# Altium PCB DSM_VB2032-241203_Pcb.PcbDoc
Units mm, origin at the board's own origin, x right, y up, seen from the top; angles counter-clockwise.
Board outline 18 x 18 mm, 4 copper layers (Top Layer, innerLayer 1, innerLayer 2, Bottom Layer), stack 0.603 mm thick; 58 components, 30 nets, 219 pads, 46 vias.
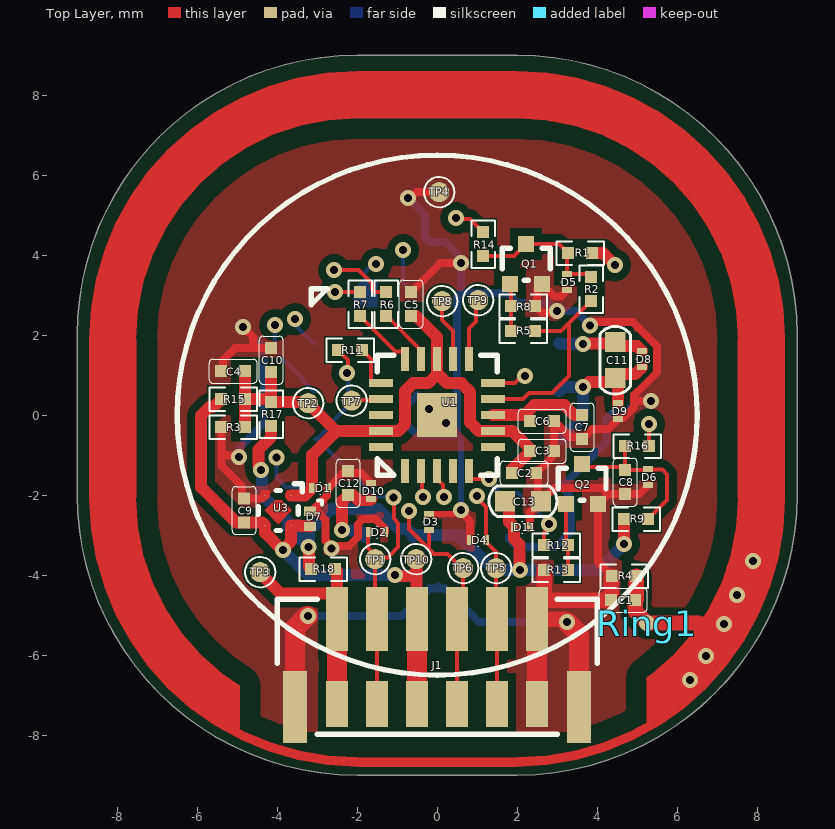
[diagram p0: Top Layer view]
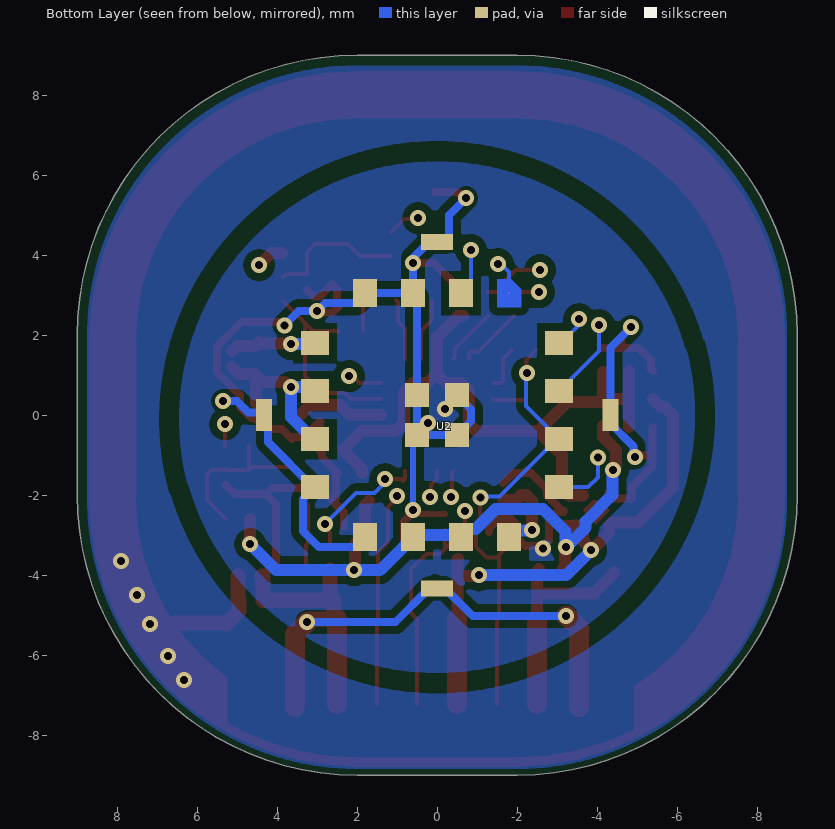
[diagram p1: Bottom Layer view, seen from below]
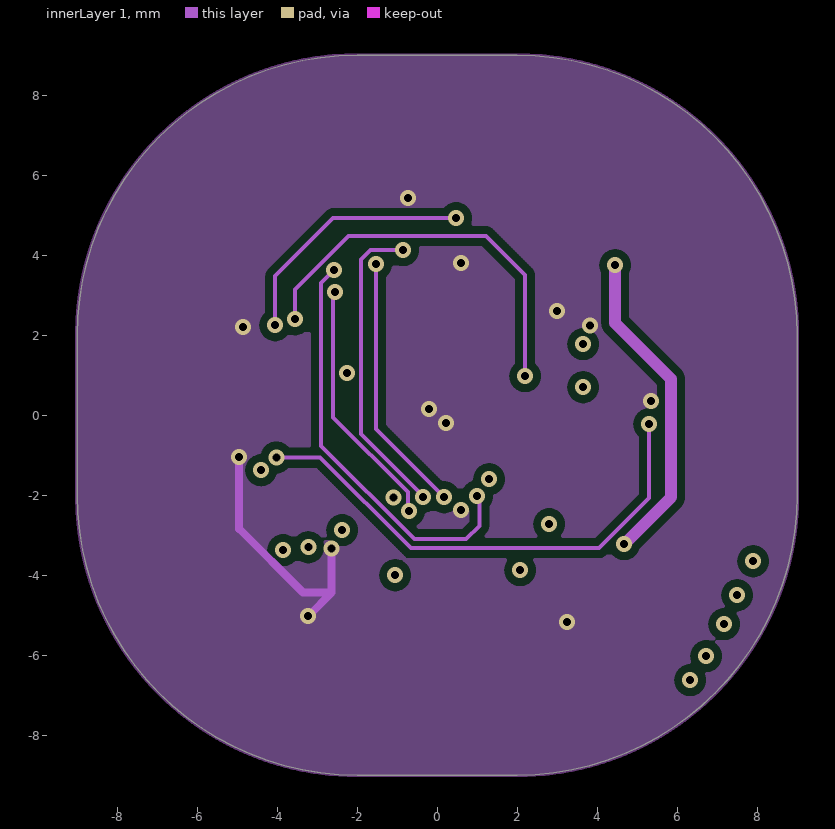
[diagram p2: innerLayer 1]
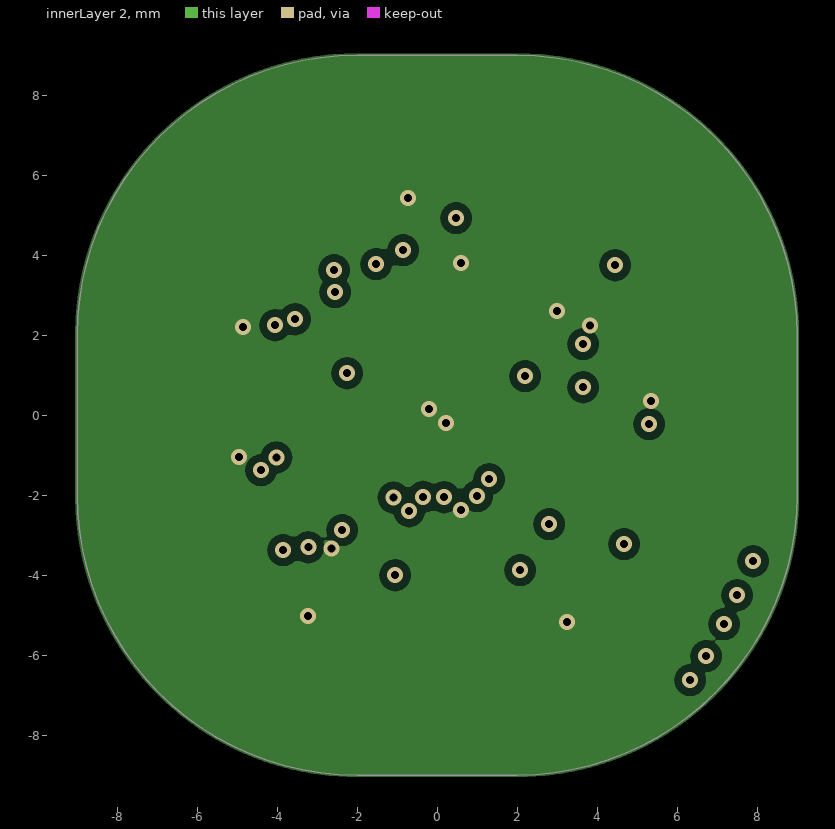
[diagram p3: innerLayer 2]
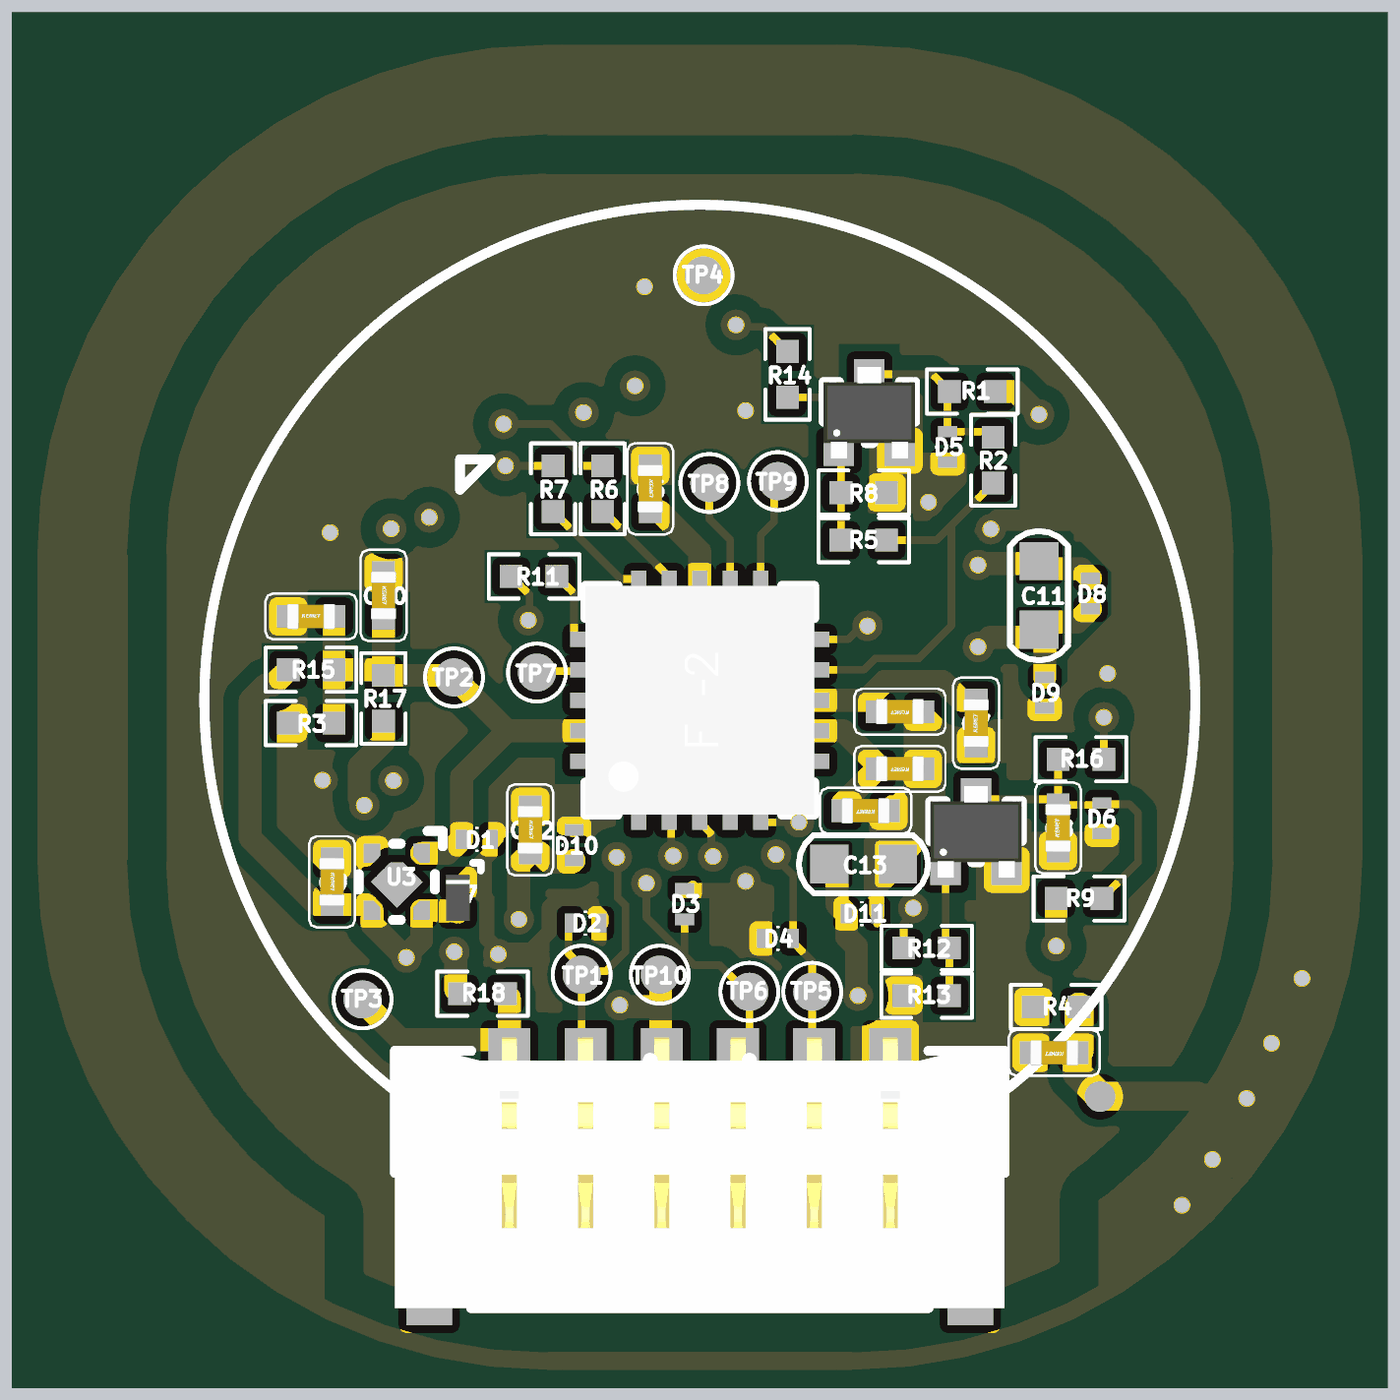
[diagram p4: 3D render of the assembled board from above, using the file's embedded part models]

## Layer stack, top to bottom
Top Solder: solder mask 0.0102, Solder Resist, Dk 3.5
Top Layer: signal copper 0.0356
Dielectric 2: prepreg 0.0711, PP-006, Dk 4.1
innerLayer 1: signal copper 0.035
Dielectric 1: dielectric 0.32, FR-4, Dk 4.8
innerLayer 2: signal copper 0.035
Dielectric 3: prepreg 0.0711, PP-006, Dk 4.1
Bottom Layer: signal copper 0.0356
Bottom Solder: solder mask 0.0102, Solder Resist, Dk 3.5

## Board outline
-2.001,-8.999 cw(c-2.001,-1.999) -9.001,-1.999 -9.001,2.001 cw(c-2.001,2.001) -2.001,9.001 1.999,9.001 cw(c1.999,2.001) 8.999,2.001 8.999,-1.999 cw(c1.999,-1.999) 1.999,-8.999

## Design rules (kind name [scope] priority, off if disabled: settings)
BoardOutlineClearance [All] p1: gap=0 ignorepadtopadclearanceinfootprint=FALSE
Clearance [All] p1: gap=0.1 ignorepadtopadclearanceinfootprint=FALSE except(0.2: Arc-Fill Arc-Poly Arc-Region Track-Fill Track-Poly Track-Region SMDPad-Fill SMDPad-Poly SMDPad-Region THPad-Fill THPad-Poly THPad-Region Via-Fill Via-Poly Via-Region; 0.5: Fill-Fill Fill-Poly Fill-Region Poly-Poly Poly-Region Region-Region)
HoleToHoleClearance [All] p1: gap=0 allowstackedmicrovias=TRUE
MinimumSolderMaskSliver [All] p1: minsoldermaskwidth=0
PolygonConnect [All] p1: connectstyle=Direct reliefconductorwidth=0.254 reliefentries=4 polygonreliefangle="90 Angle" airgapwidth=0
RoutingVias [All] p1: holewidth=0.711 width=1.27 viastyle="Through Hole" minholewidth=0.711 minwidth=1.27 maxholewidth=0.711 maxwidth=1.27
SilkToSilkClearance [All] p1: silktosilkclearance=0
SilkToSolderMaskClearance [IsPad] p1: minsilkscreentomaskgap=0 clearancetoexposedcopper=TRUE
SolderMaskExpansion [All] p1: expansion=0.102 istentingtop=FALSE
Width [All] p1: maxlimit=1 minlimit=0.1 preferedwidth=0.1
26 further rules are at their usual default settings.

## Components (designator, comment, footprint, x,y, rotation, side; value= is the part's Value field where it differs from the comment)
C1 "2.2nF,25V,10%,村田" C0201 4.65,-4.625 r180 top
C2 "2.2uF,10V,20%,太诱" C0201 2.175,-1.45 r180 top
C3 "0.1uF,16V,10%,村田" C0201 2.625,-0.9 r180 top
C4 "0.1uF,16V,10%,村田" C0201 -5.1,1.1 r0 top
C5 "0.1uF,16V,10%,村田" C0201 -0.65,2.775 r270 top
C6 "2.2uF,10V,20%,太诱" C0201 2.625,-0.15 r180 top
C7 "0.1uF,16V,10%,村田" C0201 3.625,-0.3 r90 top
C8 "47nF,16V,10%,村田" C0201 4.7,-1.675 r90 top
C9 "2.2uF,10V,20%,太诱" C0201 -4.825,-2.383 r270 top
C10 "0.1uF,16V,10%,村田" C0201 -4.15,1.375 r270 top
C11 "2.2uF,10V,20%,太诱" CC0402-M 4.45,1.375 r270 top
C12 "2.2nF,25V,10%,村田" C0201 -2.225,-1.7 r270 top
C13 "2.2uF,10V,20%,太诱" CC0402-M 2.15,-2.15 r180 top
D1 "PT4CR3V3NE" SOD-962 -2.925,-1.825 r180 top
D2 "PT4CR3V3NE" SOD-962 -1.5,-2.925 r180 top
D3 "PT4CR3V3NE" SOD-962 -0.2,-2.675 r270 top
D4 "PT4CR3V3NE" SOD-962 1.025,-3.125 r0 top
D5 "PT4CR3V3NE" SOD-962 3.25,3.325 r90 top
D6 "PT4CR3V3NE" SOD-962 5.275,-1.55 r90 top
D7 "PT4C051V" "DFN0603-2L 0.3*0.23 Pitch 0.38" -3.175,-2.59 r270 top
D8 "PT4CR3V3NE" SOD-962 5.125,1.4 r270 top
D9 "PT4C121V" SOD-962 4.525,0.1 r270 top
D10 "PT4C121V" SOD-962 -1.65,-1.9 r90 top
D11 "PT4CR3V3NE" SOD-962 2.125,-2.8 r180 top
J1 "Connector 6 Pins" A1004LF-06A 0,-6.2 r180 top
Q1 "SXSC568R//NC" SOT-723 2.225,3.775 r0 top
Q2 "SXSC568R" SOT-723 3.625,-1.725 r0 top
R1 "10KΩ,5%" R0201 3.575,4.05 r0 top
R2 "100Ω,5%" R0201 3.85,3.15 r90 top
R3 "10KΩ,5%" R0201 -5.1,-0.3 r0 top
R4 "0Ω,5%" R0201 4.675,-4.025 r0 top
R5 "2.2KΩ,5%//NC" R0201 2.15,2.1 r180 top
R6 "100Ω,5%" R0201 -1.275,2.775 r270 top
R7 "100Ω,5%" R0201 -1.925,2.775 r270 top
R8 "10KΩ,5%//NC" R0201 2.15,2.725 r0 top
R9 "10KΩ,5%" R0201 4.975,-2.6 r180 top
R11 "330Ω,5%" R0201 -2.175,1.625 r0 top
R12 "2.2KΩ,5%" R0201 2.975,-3.25 r0 top
R13 "10KΩ,5%" R0201 2.975,-3.875 r180 top
R14 "1KΩ,5%" R0201 1.15,4.275 r270 top
R15 "0Ω,5%//NC" R0201 -5.1,0.4 r0 top
R16 "1KΩ,5%" R0201 5,-0.775 r180 top
R17 "0Ω,5%//NC" R0201 -4.15,0.025 r270 top
R18 "0Ω,5%" R0201 -2.85,-3.85 r180 top
Ring1 "Ring" Ring 5.25,-5.2 r90 bottom
TP1 "TP" TP（Φ0.5） -1.55,-3.6 r90 top
TP2 "TP" TP（Φ0.5） -3.225,0.3 r90 top
TP3 "TP" TP（Φ0.5） -4.425,-3.925 r90 top
TP4 "TP" TP（Φ0.5） 0.05,5.575 r90 top
TP5 "TP" TP（Φ0.5） 1.475,-3.825 r90 top
TP6 "TP" TP（Φ0.5） 0.65,-3.825 r90 top
TP7 "TP" TP（Φ0.5） -2.137,0.363 r90 top
TP8 "TP" TP（Φ0.5） 0.125,2.85 r90 top
TP9 "TP" TP（Φ0.5） 1.025,2.875 r90 top
TP10 "TP" TP（Φ0.5） -0.525,-3.6 r90 top
U1 "ACM32FP421FIU6" "QFN 20 3*3 Pitch 0.4" 0,0 r90 top locked
U2 "BF83112DW7&D_7&F_4" BF83112DW7&D_7&F_4 0,0 r90 bottom locked
U3 "LP3997-33QVF" "DFN 1*1-4L" -3.975,-2.383 r180 top

## Footprints (in the part's own frame and the unit in brackets; to place one, negate y for a bottom-side part, rotate by r counter-clockwise, add the part's x,y. Pads: shape width x height; smd on the part's side, far side on the other; paste and mask are expansions set on the pad)
A1004LF-06A [mm] "立贴 带卡扣 不带耳朵 6 Pins 间距 1.0"
  rect 0.55x1.15 smd: 1(-2.5,1.025) 2(-1.5,1.025) 3(-0.5,1.025) 4(0.5,1.025) 5(1.5,1.025) 6(2.5,1.025)
  rect 0.55x1.6 smd: 1(-2.5,-1.1) 2(-1.5,-1.1) 3(-0.5,-1.1) 4(0.5,-1.1) 5(1.5,-1.1) 6(2.5,-1.1)
  rect 0.6x1.8 smd: A(-3.55,1.1) B(3.55,1.1)
  round 0.15 on Mech15: ""(0,0)
  silkscreen extent -4,-1.6 4,1.77, body extent -4,-1.78 4,1.77, height 4.3
BF83112DW7&D_7&F_4 [mm]
  round 0.025 smd: 1(3.05,-1.8)
  rect 0.7x0.6 smd: 2(3.05,-0.6) 3(3.05,0.6) 4(3.05,1.8) 9(-3.05,1.8) 10(-3.05,0.6) 11(-3.05,-0.6) 12(-3.05,-1.8)
  rect 0.6x0.7 smd: 5(1.8,3.05) 6(0.6,3.05) 7(-0.6,3.05) 8(-1.8,3.05) 13(-1.8,-3.05) 14(-0.6,-3.05) 15(0.6,-3.05) 16(1.8,-3.05)
  rect 0.6x0.6 smd: 17(0.5,-0.5) 18(0.5,0.5) 19(-0.5,-0.5) 20(-0.5,0.5)
  rect 0.4x0.8 smd: 21(4.33,0) 23(-4.33,0)
  rect 0.8x0.4 smd: 22(0,4.33) 24(0,-4.33)
  round 0.1 on Mech15: ""(0,0)
  round 0.1 on Mech13: ""(0.15,-0.15)
  Top Layer region: 2.7,-1.5 2.7,-2.1 3.15,-2.1 3.4,-1.85 3.4,-1.5
C0201 [mm]
  rect 0.3x0.3 smd: 1(-0.3,0) 2(0.3,0)
  round 0.05 on Mech15: ""(0,0)
  silkscreen extent -0.6,-0.3 0.6,0.3, body extent -0.31,-0.17 0.32,0.16, height 0.37
CC0402-M [mm]
  rect 0.5x0.51 smd mask+0.051: 1(-0.45,0) 2(0.45,0)
  silkscreen extent -0.85,-0.38 0.85,0.38
"DFN0603-2L 0.3*0.23 Pitch 0.38" [mm]
  rect 0.23x0.3 smd: 1(-0.19,0) 2(0.19,0)
  round 0.03 on Mech15: ""(0,0)
  silkscreen extent -0.46,0.2 -0.36,0.3, body extent -0.31,-0.16 0.31,0.15, height 0.36
"DFN 1*1-4L" [mm]
  round 0.025 smd: 1(-0.325,-0.375) 2(0.325,-0.375) 3(0.325,0.375) 4(-0.325,0.375) A(0,0.042)
  round 0.05 on Mech15: ""(0,0)
  Top Layer region: -0.085,-0.255 -0.339,0 0,0.339 0.339,0 0.085,-0.255
  Top Layer region: 0.215,-0.5 0.215,-0.337 0.302,-0.25 0.435,-0.25 0.435,-0.5
  Top Layer region: -0.435,0.25 -0.302,0.25 -0.215,0.337 -0.215,0.5 -0.435,0.5
  Top Layer region: -0.435,-0.5 -0.215,-0.5 -0.215,-0.337 -0.302,-0.25 -0.435,-0.25
  Top Layer region: 0.302,0.25 0.215,0.337 0.215,0.5 0.435,0.5 0.435,0.25
  silkscreen extent -0.6,-0.67 0.5,0.5, body extent -0.5,-0.5 0.5,0.5, height 0.59
"QFN 20 3*3 Pitch 0.4" [mm]
  rect 0.6x0.2 smd: 1(-1.4,0.8) 2(-1.4,0.4) 3(-1.4,0) 4(-1.4,-0.4) 5(-1.4,-0.8) 11(1.4,-0.8) 12(1.4,-0.4) 13(1.4,0) 14(1.4,0.4) 15(1.4,0.8)
  rect 0.2x0.6 smd: 6(-0.8,-1.4) 7(-0.4,-1.4) 8(0,-1.4) 9(0.4,-1.4) 10(0.8,-1.4) 16(0.8,1.4) 17(0.4,1.4) 18(0,1.4) 19(-0.4,1.4) 20(-0.8,1.4)
  rect 1.1x1 smd: A(0,0)
  round 0.1 on Mech15: ""(0,0)
  silkscreen extent -1.5,-1.5 1.5,1.5, body extent -1.5,-1.5 1.5,1.5, height 0.65
R0201 [mm]
  rect 0.3x0.3 smd: 1(-0.3,0) 2(0.3,0)
  round 0.05 on Mech15: ""(0,0)
  silkscreen extent -0.6,-0.29 0.6,0.29, body extent -0.3,-0.15 0.3,0.15, height 0.27
Ring [mm] "直径0.4mm"
  round 0.4 smd far side mask+0.102: 1(0,0)
SOD-962 [mm] "类似0201"
  rect 0.15x0.25 smd: 1(-0.2,0) 2(0.2,0)
  round 0.05 on Mech15: ""(0,0)
  silkscreen extent -0.01,-0.15 0.01,0.15, body extent -0.3,-0.15 0.3,0.15, height 0.37
SOT-723 [mm]
  rect 0.4x0.4 smd: 1(-0.4,-0.5) 2(0.4,-0.5) 3(0,0.5)
  round 0.1 on Mech15: ""(0,0)
  silkscreen extent -0.6,-0.4 0.6,0.4, body extent -0.6,-0.6 0.6,0.6, height 0.59
TP（Φ0.5） [mm]
  round 0.5 smd: 1(0,0)
  round 0.1 on Mech15: ""(0,0)
  silkscreen extent -0.38,-0.38 0.38,0.38

## Part data
C1 C2 C3 C4 C5 C6 C7 C8 C9 C10 C11 C12 C13: library part Cap, "贴片电容", supplier=深圳市扬盛达科技有限公司
  C1 C12: Material code=3040100000019
  C2 C6 C9 C11 C13: Material code=3040000000063
  C3 C4 C5 C7 C10: Material code=3040100000012
  C8: Material code=3040100000024
D1 D2 D3 D4 D5 D6 D7 D8 D11: library part ESD, "双向静电二极管", supplier=深圳市玛珂斯科技有限公司
  D1 D2 D3 D4 D5 D6 D8 D11: Material code=3160100000178
  D7: Material code=3160100000174
D9 D10: library part TVS, "双向瞬态抑制二极管", Material code=3160100000173, supplier=深圳市玛珂斯科技有限公司
J1: "连接器", supplier=深圳市富美康电子有限公司
Q1 Q2: library part "NPN BCE", "NPN型三极管", Material code=3160100000013, supplier=深圳市扬盛达科技有限公司
R1 R2 R3 R4 R5 R6 R7 R8 R9 R11 R12 R13 R14 R15 R16 R17 R18: library part RES, "贴片电阻", supplier=深圳市扬盛达科技有限公司
  R1 R3 R8 R9 R13: Material code=3050000000004
  R2 R6 R7: Material code=3050000000018
  R4 R15 R17 R18: Material code=3050000000061
  R5 R12: Material code=3050000000006
  R11: Material code=3050000000007
  R14 R16: Material code=3050000000003
Ring1: "金属环", supplier=深圳市添营精密科技有限公司&东莞市飞佳五金有限公司&东莞市盟展五金科技有限公司
TP1 TP2 TP3 TP4 TP5 TP6 TP7 TP8 TP9 TP10: "非正常物料无需采购", Material code=无, supplier=非正常物料线路板厂会做好的
U1: library part ACM32FP421, "微控制单元", Material code=3350000000037, supplier=上海航芯电子科技股份有限公司
U2: "电容按压式指纹识别芯片", supplier=深圳贝特莱电子科技股份有限公司
U3: library part "LDO 4 Pins", "线性稳压器", supplier=深圳市思派德科技有限公司

## Via types
v1: diameter 0.4, hole 0.2, Top Layer to Bottom Layer, tented both sides, 46 vias

## Nets (pads, with @x,y where several pads share a name; then routed paths per layer and width w, separated by ;. In a path a pad name is that pad's centre, name@x,y a point inside that pad or via, vN(x,y) a via of type N, cw(c..) or ccw(c..) an arc to the next point about the centre after c; other vN are vias at no path point)
5V: C9.2 D7.2 J1.4 R15.1 TP10.1 U3.3 U3.4 | length 13.7
  Top Layer w0.3: R15.1 -5.6,0.2 -5.695,0.2 -5.9,-0.005 -5.9,-1.803 -5.02,-2.683 -4.375,-2.683 U3.3 -4.3,-2.833 -4.3,-2.943 v1@-3.868,-3.375 ; v1(-3.85,-3.375) -3.85,-3.349 -3.65,-3.149 U3.4 -3.436,-2.758 -3.429,-2.765 -3.19,-2.765 D7.2 ; v1(-1.05,-4) -1.031,-4.019 -0.518,-4.019 -0.513,-4.025 ; TP10.1 -0.513,-3.612 -0.513,-4.025 ; J1.4@-0.5,-5.1 -0.513,-5.088 -0.513,-4.025
  Top Layer w0.5: J1.4@-0.5,-7.225 J1.4@-0.5,-5.1
  Bottom Layer w0.3: v1(-3.85,-3.375) -3.225,-4 v1(-1.05,-4)
BOOT: TP7.1 U1.17 | length 0.8
  Top Layer w0.1: TP7.1 -2.118,0.382 -1.418,0.382 U1.17
ESD-GND: C1.1 R4.2 Ring1.1 | length 5.5
  Top Layer w0.381: R4.2 4.975,-4.6 C1.1 4.95,-4.895 5.25,-5.195 Ring1.1 5.254,-5.196 6.533,-5.196 6.558,-5.221 7.171,-5.221 v1(7.175,-5.225) 7.175,-5.23 6.81,-5.595 6.81,-5.628 6.54,-5.897 6.487,-5.897 6,-6.384 6,-6.95
  other v1: 6.325,-6.625 6.725,-6.025 7.5,-4.5 7.9,-3.65
FP_INT: D2.2 J1.5 R11.1 TP1.1 U2.14 | length 11.6
  Top Layer w0.1: R11.1 -2.234,1.384 -2.234,1.066 v1(-2.25,1.05) ; D2.2 -1.725,-2.95 -1.725,-3.317 -1.55,-3.492 TP1.1 ; J1.5@-1.5,-7.225 -1.5,-5.1 -1.55,-5.05 TP1.1 ; v1(-1.09,-2.059) -1.078,-2.071 -1.078,-2.587 -0.975,-2.691 -0.975,-3.3 -1.23,-3.555 -1.505,-3.555 TP1.1
  Bottom Layer w0.1: U2.14 U2.14@-3,-0.6 ; v1(-2.25,1.05) -2.225,1.025 -2.225,0.225 -2.75,-0.3 -2.75,-0.35 U2.14@-3,-0.6 ; v1(-1.09,-2.059) -1.114,-2.035 -1.565,-2.035 U2.14@-3,-0.6
FVDD: C11.1 D8.1 U2.5 | length 2.2
  Top Layer w0.3: v1(3.65,1.775) 3.669,1.794 4.419,1.794 C11.1 4.55,1.725 5,1.725 D8.1
  Bottom Layer w0.3: U2.5 3.075,1.775 v1(3.65,1.775)
FVSS: C11.2 D8.2 D9.1 U2.6 U2.7 | length 4.6
  Top Layer w0.3: v1(3.65,0.7) 3.677,0.7 3.802,0.825 4.35,0.825 C11.2 ; D9.1 4.525,0.85 C11.2 ; D8.2 4.95,1.025 4.55,1.025 C11.2
  Bottom Layer w0.3: U2.7 3.1,-0.6 3.65,-0.05 v1(3.65,0.7) 3.15,0.7 U2.6
GND: C1.2 C2.1 C3.1 C4.1 C5.1 C6.1 C7.1 C8.1 C9.1 C10.1 C12.1 C13.1 D1.1 D2.1 D3.1 D4.1 D5.1 D6.1 D7.1 D9.2 D10.2 D11.1 J1.1 J1.A J1.B Q1.2 Q2.2 R3.1 R4.1 R8.2 R13.2 TP4.1 U1.A U2.3 U2.4 U2.8 U2.9 U2.17 U2.18 U2.19 U2.20 U2.21 U2.22 U2.23 U2.24 U3.2 | length 81.7
  Top Layer w0.15: D3.1 0.432,-2.475 0.532,-2.375 v1(0.6,-2.375)
  Top Layer w0.2: R3.1 -5.388,-0.313 -5.388,-0.904 ; C4.1 -5.35,1.15 -5.35,1.383 -5.233,1.5 -5.225,1.5 -5.05,1.675 -4.6,1.675 ; v1(-4.95,-1.05) -4.988,-1.012 -5.28,-1.012 -5.388,-0.904 ; C9.1@-4.875,-2.083 -4.875,-1.785 -5.388,-1.272 -5.388,-0.904 ; v1(-4.85,2.2) -4.6,1.95 -4.6,1.675 ; C9.1 -4.375,-2.083 U3.2 ; C10.1 -4.6,1.675 ; v1(-2.645,-3.332) -2.645,-3.278 -2.793,-3.13 -2.793,-2.614 -2.992,-2.415 -3.16,-2.415 D7.1 -3.14,-2.4 -2.75,-2.01 -2.75,-1.85 D1.1 -2.35,-1.45 -2.275,-1.45 C12.1 -2.175,-1.45 -1.9,-1.45 D10.2 ; v1@-2.595,-3.275 -2.209,-3.275 -1.975,-3.041 -1.975,-2.717 -1.858,-2.6 -1.542,-2.6 -1.3,-2.842 D2.1 ; v1(-0.725,5.425) -0.671,5.425 -0.521,5.575 TP4.1 ; C5.1 0.075,3.8 v1(0.6,3.8) ; v1(0.6,-2.375) 0.6,-2.429 0.825,-2.654 D4.1 ; D11.1 2.325,-2.425 2.445,-2.305 2.45,-2.305 2.6,-2.155 C13.1 ; C6.1@2.925,-0.175 C3.1 2.875,-0.95 2.875,-1.05 C2.1 2.525,-1.5 2.525,-2.075 C13.1 ; C6.1 2.912,-0.162 2.937,-0.162 3.325,-0.55 3.575,-0.55 C7.1 3.875,-0.35 4.275,-0.35 D9.2 4.55,-0.075 4.645,-0.075 4.925,0.205 4.925,0.353 ; v1(3,2.6) 2.962,2.562 2.637,2.562 2.625,2.55 R8.2 2.5,2.775 2.5,3.15 Q1.2 2.904,2.996 2.93,2.97 3.095,2.97 3.225,3.1 D5.1 ; v1(3.818,2.246) 3.856,2.284 3.934,2.284 3.975,2.325 4.895,2.325 5.5,1.72 5.5,1.075 4.925,0.5 4.925,0.353 ; R4.1 4.025,-3.675 Q2.2 4.275,-1.975 ; D6.1@5.25,-1.775 5.05,-1.975 C8.1 4.275,-1.975 ; v1(5.35,0.35) 5.347,0.353 4.925,0.353 ; C13.1 2.6,-2.145 2.92,-1.825 4.125,-1.825 4.275,-1.975
  Top Layer w0.381: R13.2 2.675,-4.534 J1.1@2.584,-4.625 ; v1(3.25,-5.175) 3.245,-5.175 3.17,-5.1 2.5,-5.1 2.584,-5.015 J1.1@2.584,-4.625 ; R4.1 4.35,-4.05 C1.2 J1.1@2.584,-4.625
  Top Layer w0.5: J1.B -3.55,-5.318 -3.257,-5.025 v1(-3.225,-5.025) ; J1.1@2.5,-7.225 J1.1@2.5,-5.1 ; v1(3.25,-5.175) 3.55,-5.475 J1.A
  innerLayer 1 w0.2: v1(-4.95,-1.05) -4.95,-2.841 -3.354,-4.436 -2.636,-4.436 ; v1(-3.225,-5.025) -2.636,-4.436 ; v1(-2.645,-3.332) -2.645,-4.428 -2.636,-4.436
  Bottom Layer w0.15: U2.20 0.6,-0.6 v1(0.6,-2.375)
  Bottom Layer w0.2: v1(-4.95,-1.05) -4.912,-1.012 -4.912,-0.782 -4.33,-0.2 U2.24 -4.33,1.68 v1(-4.85,2.2) ; v1(-3.225,-5.025) -0.895,-5.025 -0.2,-4.33 U2.23 ; v1(-0.725,5.425) -0.3,5 -0.3,4.43 -0.2,4.33 U2.21 0.2,4.33 0.6,3.93 U2.3 ; U2.17 -0.85,0.15 -0.85,-0.15 U2.19 U2.20 U2.18 0.5,2.95 U2.3 ; U2.23@0.05,-4.28 U2.23 ; U2.9 1.8,-3.1 2,-3.3 2.95,-3.3 3.35,-2.9 3.35,-2.1 3.3,-2.05 3.3,-2 U2.8@3.1,-1.8 ; U2.8 U2.8@3.1,-1.8 ; v1(3.25,-5.175) 1.045,-5.175 0.2,-4.33 U2.23 ; v1(3.818,2.246) 3.464,2.6 v1(3,2.6) 2.8,2.8 2,2.8 1.8,3 U2.4 U2.3 ; v1(5.35,0.35) 5,0.35 4.713,0.063 4.393,0.063 U2.22 4.23,-0.1 4.23,-0.67 U2.8@3.1,-1.8
  other v1: 0.225,-0.2 -0.2,0.15
HVDD: C12.2 D10.1 U2.12 | length 2.2
  Top Layer w0.3: v1@-2.375,-2.848 -2.375,-2.15 C12.2 -2.1,-2 -1.975,-2.125 -1.675,-2.125 D10.1
  Bottom Layer w0.3: v1(-2.375,-2.875) -2.367,-2.875 -2.353,-2.889 -1.95,-2.889 -1.95,-2.9 U2.12
INT: R11.2 U1.16 | length 1.1
  Top Layer w0.1: R11.2 -1.65,1.4 -1.65,0.85 -1.6,0.8 U1.16
MCU3_3V: C2.2 C3.2 C4.2 C5.2 C10.2 D1.2 R3.2 R15.2 R17.1 TP2.1 U1.7 U1.13 U1.19 U3.1 | length 16.8
  Top Layer w0.3: R3.2 R15.2 ; C4.2 R15.2 ; C10.2 R17.1 ; U3.1 -3.308,-2.008 D1.2 -3.125,-1 -2.525,-0.4 ; C5.2 -0.525,2.475 0,1.95 U1.13 0,1.026 ; C2.2 1.875,-1.35 C3.2 2.325,-0.841 1.884,-0.4 U1.7 1.046,-0.4 0.825,-0.179 0.825,0.579 0.604,0.8 0.246,0.8 0.021,1.026 0,1.026 ; R15.2 -4.225,0.4 R17.1 ; R17.1 -3.25,0.325 TP2.1 -2.525,-0.4 ; -2.525,-0.4 U1.19 -0.976,-0.4 -0.8,-0.224 -0.8,0.604 -0.604,0.8 -0.226,0.8 0,1.026
NetQ1_1: Q1.1 R5.2 R8.1 | length 1.2
  Top Layer w0.1: Q1.1 1.85,3.25 R8.1 R5.2
NetQ2_1: Q2.1 R12.2 R13.1 | length 1.7
  Top Layer w0.1: Q2.1 3.225,-3.2 R12.2 R13.1
NSS: R14.1 U2.15 | length 9.3
  Top Layer w0.1: v1(0.475,4.925) 0.5,4.9 0.825,4.9 R14.1
  innerLayer 1 w0.1: v1(-4.05,2.25) -4.05,3.475 -2.6,4.925 v1(0.475,4.925)
  Bottom Layer w0.1: v1(-4.05,2.25) -4.05,1.6 -3.35,0.9 -3.35,0.85 -3.1,0.6 U2.15
RSTN: R16.1 U2.13 | length 14.7
  Top Layer w0.1: R16.1 v1(5.3,-0.225)
  innerLayer 1 w0.1: v1(-4.019,-1.056) -2.929,-1.056 -0.659,-3.325 4.045,-3.325 5.3,-2.07 v1(5.3,-0.225)
  Bottom Layer w0.1: v1(-4.019,-1.056) -4.019,-1.556 -3.775,-1.8 U2.13
SPI_CLK: U1.10 U2.16 | length 11.7
  Top Layer w0.1: U1.10 1.944,0.8 2.119,0.975 v1(2.2,0.975)
  innerLayer 1 w0.1: v1(-3.55,2.4) -3.55,3.145 -2.22,4.475 1.225,4.475 2.2,3.5 v1(2.2,0.975)
  Bottom Layer w0.1: v1(-3.55,2.4) -3.55,2.25 -3.1,1.8 U2.16
SPI_CS_MCU: R2.1 R5.1 U1.9 | length 5.2
  Top Layer w0.1: U1.9 2.151,0.4 2.301,0.55 2.875,0.55 3.3,0.975 3.3,2.3 ; R5.1 3.1,2.1 3.3,2.3 ; R2.1 3.3,2.3
SPI_MISO: U1.3 U2.1 | length 8.1
  Top Layer w0.1: U1.3 0,-1.6 0.15,-1.75 0.15,-2.025 v1(0.175,-2.05)
  innerLayer 1 w0.1: v1(-1.525,3.775) -1.525,-0.35 v1(0.175,-2.05)
  Bottom Layer w0.1: U2.1 -1.8,3.575 -1.6,3.775 v1(-1.525,3.775)
SPI_MOSI: U1.2 U2.2 | length 9.6
  Top Layer w0.1: U1.2 -0.375,-1.425 -0.375,-2.018 v1(-0.35,-2.043)
  innerLayer 1 w0.1: v1(-0.85,4.125) -1.67,4.125 -1.9,3.895 -1.9,-0.471 -0.35,-2.021 v1(-0.35,-2.043)
  Bottom Layer w0.1: v1(-0.85,4.125) -0.85,3.3 U2.2
SPI_NSS: D5.2 Q1.3 R1.1 R2.2 R14.2 | length 3.5
  Top Layer w0.1: R14.2 1.925,3.975 Q1.3 3.05,4.275 3.25,4.075 D5.2 3.775,3.525 R2.2
SPI_RST: C8.2 D6.2 Q2.3 R9.1 R16.2 | length 4.1
  Top Layer w0.1: Q2.3@3.625,-1.3 4.625,-1.3 C8.2 ; R16.2 C8.2 ; R9.1 5.75,-2.125 5.75,-1.481 5.633,-1.364 5.289,-1.364 D6.2 5.25,-1.375 C8.2
SPI_RST_MCU: R12.1 U1.5 | length 3.4
  Top Layer w0.1: U1.5 0.8,-1.6 0.85,-1.65 0.85,-1.6 v1(1.3,-1.6) ; R12.1 2.675,-2.931 2.8,-2.806 v1(2.8,-2.725)
  Bottom Layer w0.1: v1(1.3,-1.6) 1.3,-1.681 1.567,-1.949 2.023,-1.949 v1(2.8,-2.725)
SWCK: TP9.1 U1.11 | length 1.6
  Top Layer w0.1: U1.11 0.8,2.166 0.975,2.341 0.975,2.825 TP9.1
SWDO: TP8.1 U1.12 | length 1.6
  Top Layer w0.1: TP8.1 0.125,2.375 0.4,2.1 U1.12
UART_RX: D4.2 J1.2 R6.1 TP5.1 | length 17.4
  Top Layer w0.1: v1(-2.575,3.625) -1.963,3.625 -1.625,3.287 -1.625,3.15 -1.55,3.075 R6.1 ; v1(1,-2.025) 1,-2.07 1.225,-2.295 D4.2 1.225,-3.175 1.475,-3.425 TP5.1 1.475,-5.075 1.5,-5.1 J1.2@1.5,-7.225
  innerLayer 1 w0.1: v1(-2.575,3.625) -2.9,3.3 -2.9,-0.77 -0.57,-3.1 0.725,-3.1 1.057,-2.768 1.057,-2.082 v1(1,-2.025)
UART_RX1: R6.2 U1.14 | length 1.4
  Top Layer w0.1: R6.2 -1.175,2.375 -1.16,2.375 -0.45,1.665 -0.45,1.45 U1.14
UART_TX: D3.2 J1.3 R7.1 TP6.1 | length 13
  Top Layer w0.1: v1(-2.55,3.075) R7.1 ; v1(-0.7,-2.4) -0.7,-2.85 -0.2,-3.35 ; D3.2 -0.2,-3.35 ; J1.3@0.5,-7.225 0.5,-5.1 0.65,-4.95 TP6.1 TP6.1@0.578,-3.753 ; TP6.1@0.56,-3.772 0.263,-3.475 -0.075,-3.475 -0.2,-3.35
  innerLayer 1 w0.1: v1(-2.55,3.075) -2.6,3.025 -2.6,-0.054 -0.728,-1.926 -0.728,-2.372 v1(-0.7,-2.4)
UART_TX1: R7.2 U1.15 | length 1.7
  Top Layer w0.1: R7.2 -1.041,1.591 -0.85,1.591 -0.8,1.541 U1.15
VCC3.3V: J1.6 R18.1 TP3.1 | length 5.4
  Top Layer w0.3: TP3.1 -4.425,-3.95 -3.922,-4.453 -2.503,-4.453 -2.5,-4.45 -2.5,-3.9 R18.1 ; J1.6@-2.5,-5.1 J1.6@-2.5,-4.575
  Top Layer w0.5: J1.6@-2.5,-7.225 J1.6@-2.5,-5.1
VCC3_3V: C13.2 D11.2 R1.2 R9.2 R17.2 R18.2 U2.10 U2.11 | length 25
  Top Layer w0.3: v1(-4.402,-1.377) -4.402,-1.35 -4.469,-1.283 -4.469,-0.869 -4.15,-0.55 R17.2 ; v1(-3.221,-3.301) -3.202,-3.32 -3.202,-3.798 R18.2 ; C13.2 1.8,-2.25 1.8,-2.675 D11.2 1.925,-3.098 2.056,-3.229 2.056,-3.856 v1(2.075,-3.875) ; R1.2 4.15,4.05 v1(4.45,3.75) ; v1(4.675,-3.225) R9.2
  innerLayer 1 w0.3: v1(4.45,3.75) 4.45,2.3 5.85,0.9 5.85,-2.05 v1(4.675,-3.225)
  Bottom Layer w0.3: v1(-4.402,-1.377) -4.383,-1.396 -4.383,-1.992 -3.714,-2.661 -3.714,-2.811 -3.224,-3.301 v1(-3.221,-3.301) ; v1@-3.225,-3.3 -3.206,-3.281 -3.206,-2.906 -2.65,-2.35 -1.461,-2.35 -0.961,-2.85 -0.75,-2.85 U2.11@-0.6,-3 ; U2.11 U2.11@-0.6,-3 ; U2.10@0.55,-3 U2.11@-0.6,-3 ; U2.10@0.6,-3 0.6,-3.1 0.75,-3.25 0.8,-3.25 1.425,-3.875 v1(2.075,-3.875) 4.025,-3.875 v1(4.675,-3.225)
VDD12: C6.2 C7.2 U1.8 | length 2.4
  Top Layer w0.3: U1.8 2.175,0 2.425,0.25 3.179,0.25 3.429,0 C7.2
pads on no net: C1. C2. C3. C4. C5. C6. C7. C8. C9. C10. C12. D1. D2. D3. D4. D5. D6. D7. D8. D9. D10. D11. J1. Q1. Q2. R1. R2. R3. R4. R5. R6. R7. R8. R9. R11. R12. R13. R14. R15. R16. R17. R18. TP1. TP2. TP3. TP4. TP5. TP6. TP7. TP8. TP9. TP10. U1. U1.1 U1.4 U1.6 U1.18 U1.20 U2. U3. U3.A

## Polygon pours and split planes (outlines as drawn)
GND on Bottom Layer "GND_L04_P013" (hatched Horizontal grid 0.01 track 0.1, remove dead copper, pour order 13): -2.001,-8.999 cw(c-2.001,-1.999) -9.001,-1.999 -9.001,2.001 cw(c-2.001,2.001) -2.001,9.001 1.999,9.001 cw(c1.999,2.001) 8.999,2.001 8.999,-1.999 cw(c1.999,-1.999) 1.999,-8.999
ESD-GND on Bottom Layer "ESD-GND_L04_P005" (hatched Horizontal grid 0.01 track 0.1, remove dead copper, pour order 5): 2,8.6 cw(c2,1.9) 8.7,1.9 8.7,-2.1 cw(c2,-2.1) 2,-8.8 -2,-8.8 cw(c-2,-2.1) -8.7,-2.1 -6.708,-2.1 ccw(c0,-0.1) -6.708,1.9 -8.7,1.9 cw(c-2,1.9) -2,8.6
ESD-GND on Bottom Layer "ESD-GND_L04_P003" (hatched Horizontal grid 0.01 track 0.1, remove dead copper, pour order 3): -2,-8.7 cw(c-2,-2) -8.7,-2 -8.7,2 cw(c-2,2) -2,8.7 2,8.7 cw(c2,2) 8.7,2 6.708,2 ccw(c0,0) 6.708,-2 8.7,-2 cw(c2,-2) 2,-8.7
GND on innerLayer 1 "GND_L02_P011" (hatched Horizontal grid 0.01 track 0.1, remove dead copper, pour order 11): -2.001,-8.999 cw(c-2.001,-1.999) -9.001,-1.999 -9.001,2.001 cw(c-2.001,2.001) -2.001,9.001 1.999,9.001 cw(c1.999,2.001) 8.999,2.001 8.999,-1.999 cw(c1.999,-1.999) 1.999,-8.999
GND on innerLayer 2 "GND_L03_P012" (hatched Horizontal grid 0.01 track 0.1, remove dead copper, pour order 12): -2.001,-8.999 cw(c-2.001,-1.999) -9.001,-1.999 -9.001,2.001 cw(c-2.001,2.001) -2.001,9.001 1.999,9.001 cw(c1.999,2.001) 8.999,2.001 8.999,-1.999 cw(c1.999,-1.999) 1.999,-8.999
GND on Top Layer "GND_L01_P006" (hatched Horizontal grid 0.01 track 0.1, remove dead copper, pour order 6): -2.001,-8.999 cw(c-2.001,-1.999) -9.001,-1.999 -9.001,2.001 cw(c-2.001,2.001) -2.001,9.001 1.999,9.001 cw(c1.999,2.001) 8.999,2.001 8.999,-1.999 cw(c1.999,-1.999) 1.999,-8.999

## Other copper
Top Layer:
  region net ESD-GND: 69 vertices and 2 holes, not listed, extent -8.694,-8.785 8.694,8.602

## Silkscreen, mask and mechanical layers (free items; w line width, h text height)
Top Overlay:
  circle w0.13: c0,0 r6.5
Mechanical 1:
  the board outline again, w0.013

## Text inside footprints (layer, text, board x,y; h text height)
U2: Mechanical 15 "SIZE 4.8*5.6" at -2.15,-1.48 h0.1 r90; Mechanical 15 "BF83112D_7/DW7 PIXEL AREA 0.00,0.20" at -1.567,-1.48 h0.1 r90; Mechanical 15 "BF83112F_4 PIXEL AREA 0.15,0.15" at -1.867,-1.48 h0.1 r90; Mechanical 15 "X" at -0.95,-1.692 h0.1 r90; Mechanical 15 "Y" at -1.55,-2.033 h0.1 r90